# Altium PCB haut_droite.PcbDoc
Units mm, origin at the board's own origin, x right, y up, seen from the top; angles counter-clockwise.
Board outline 200.03 x 200.03 mm, 2 copper layers (TopLayer, BottomLayer); 69 components, 23 nets, 163 pads, 49 vias.
Unrouted connection lines stored in the file: 1.
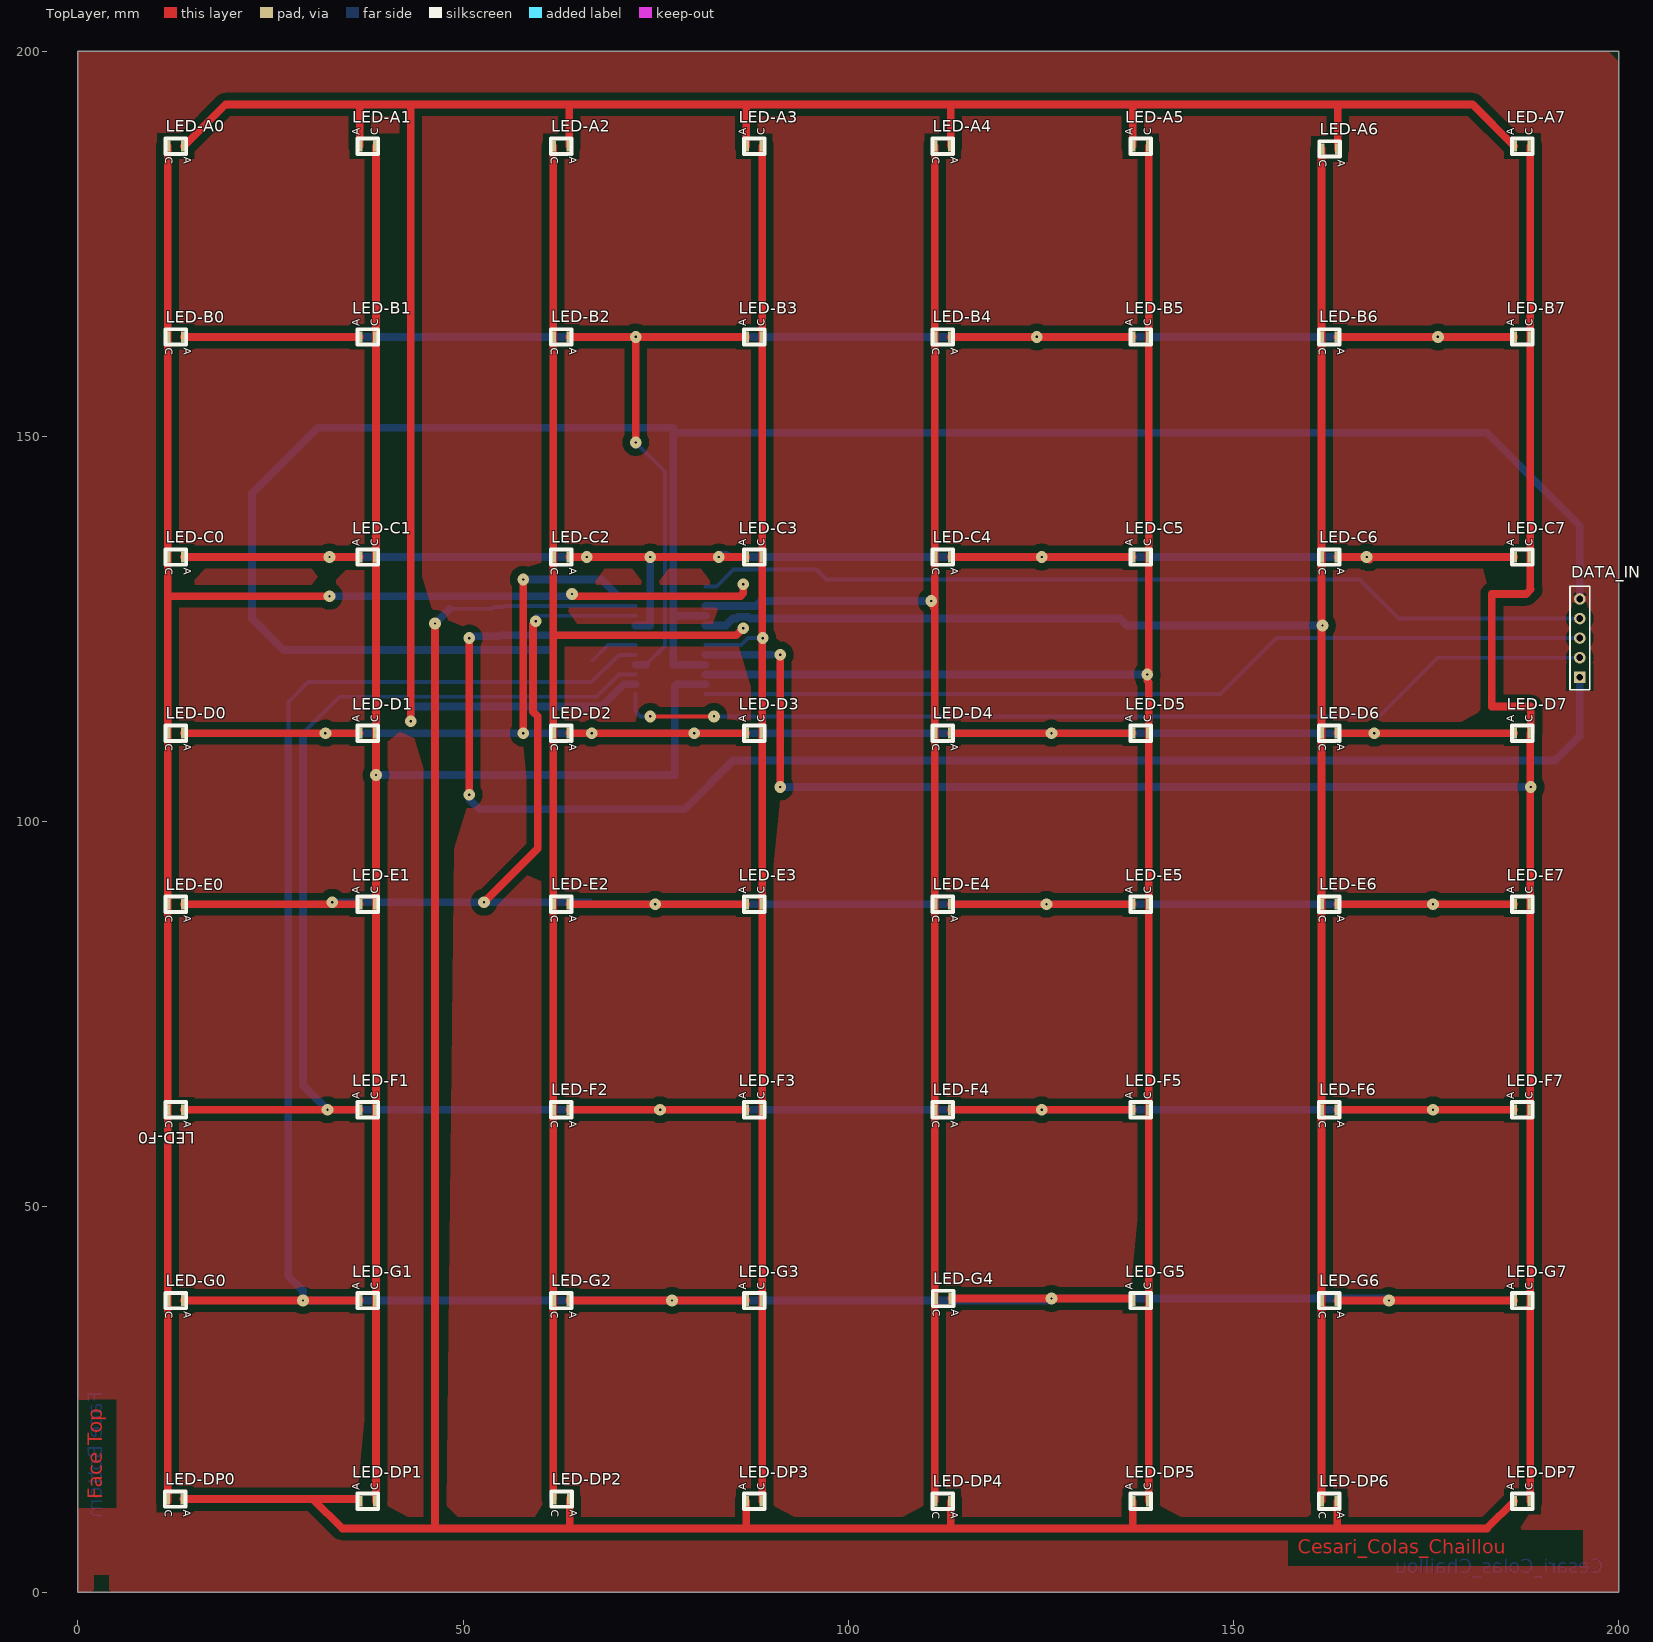
[diagram p0: TopLayer view]
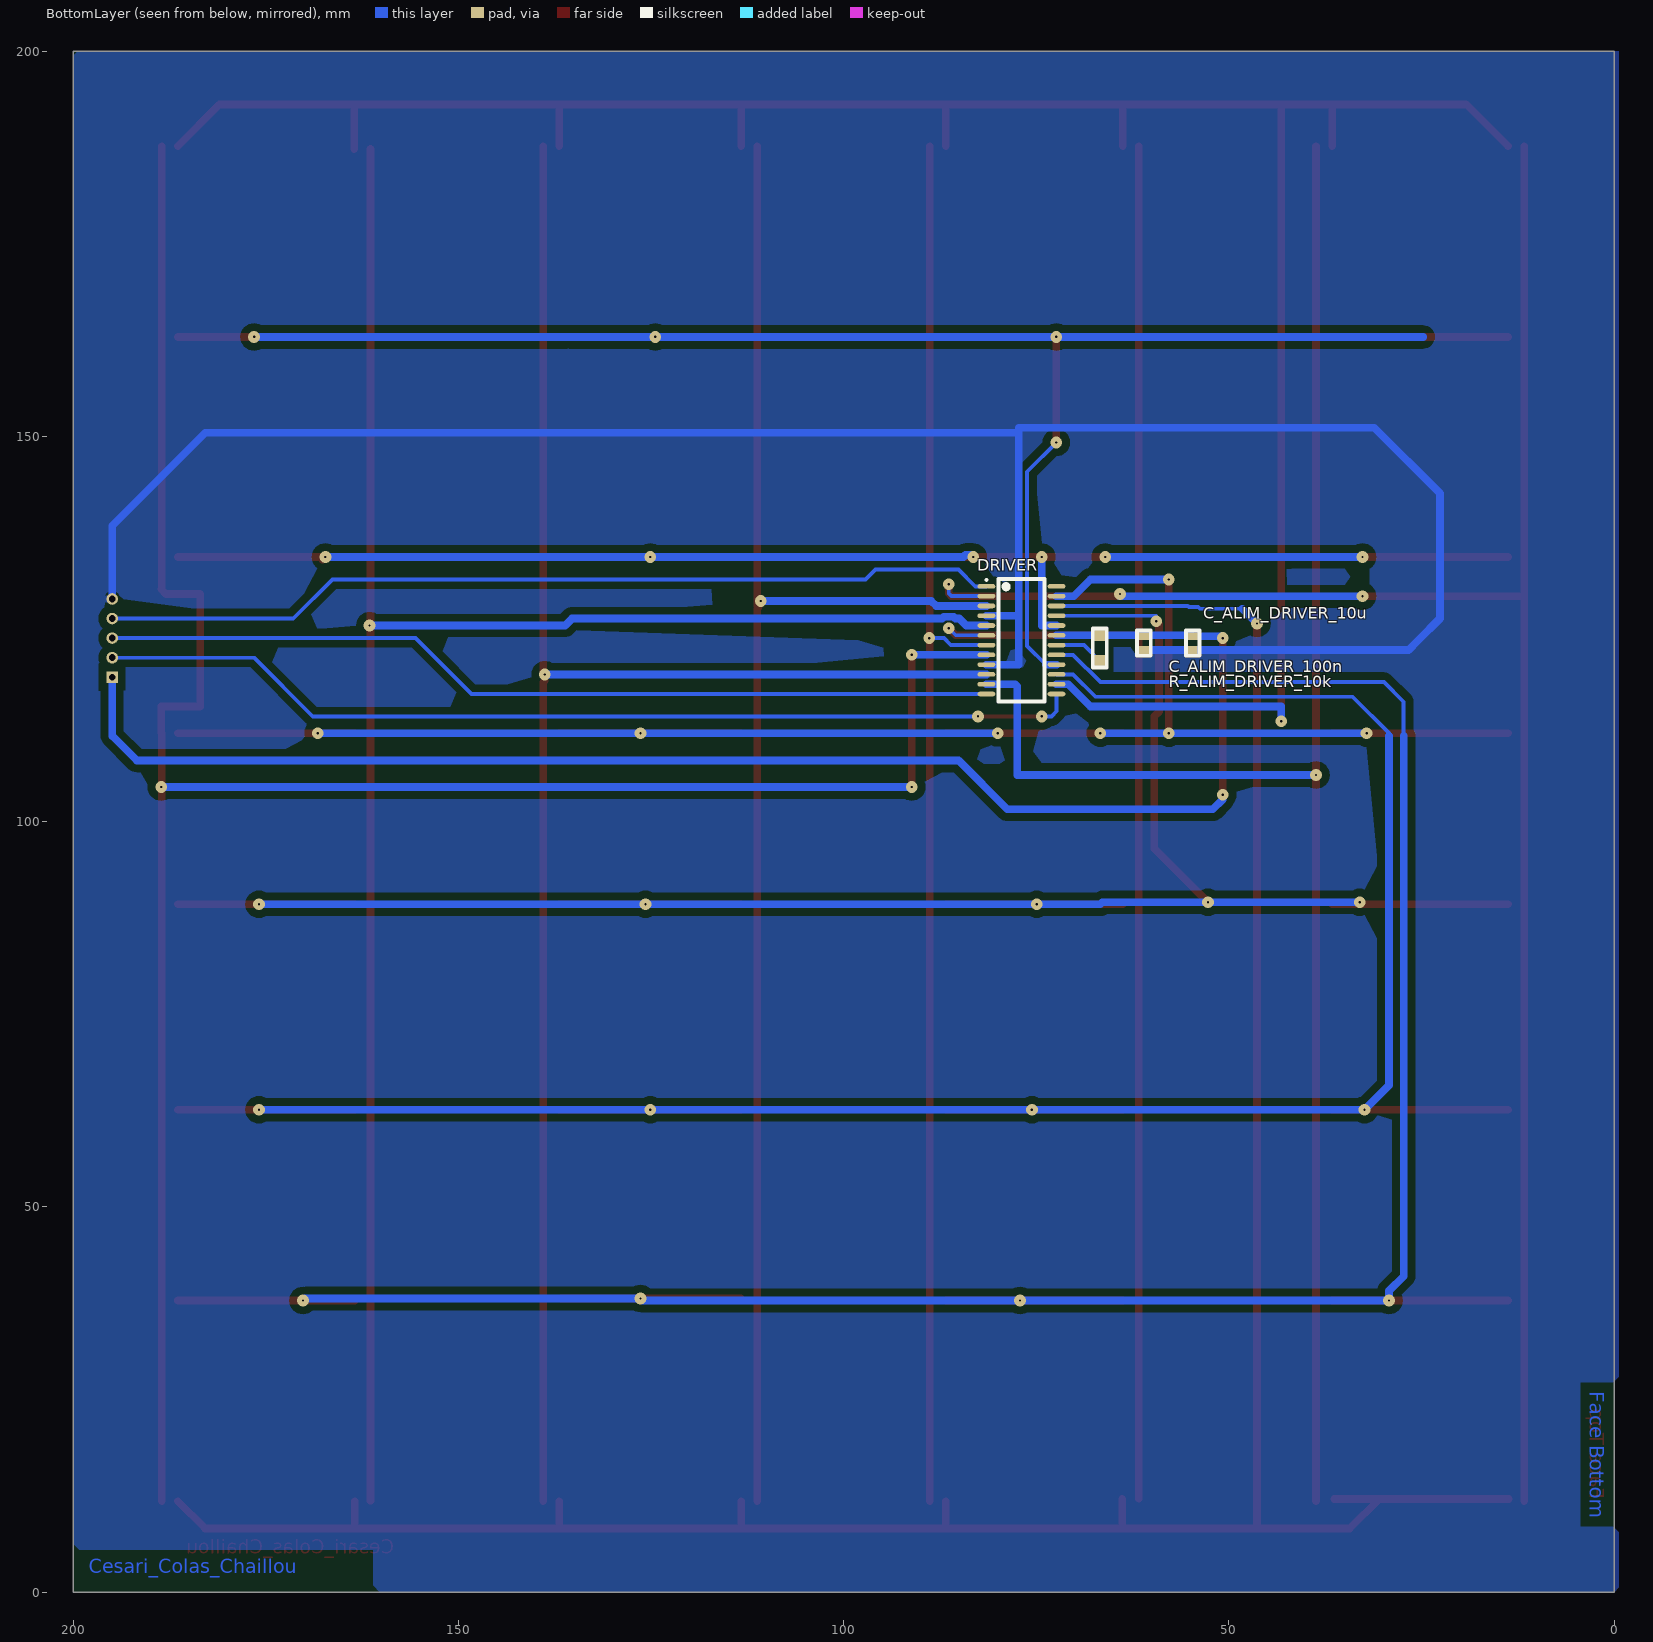
[diagram p1: BottomLayer view, seen from below]
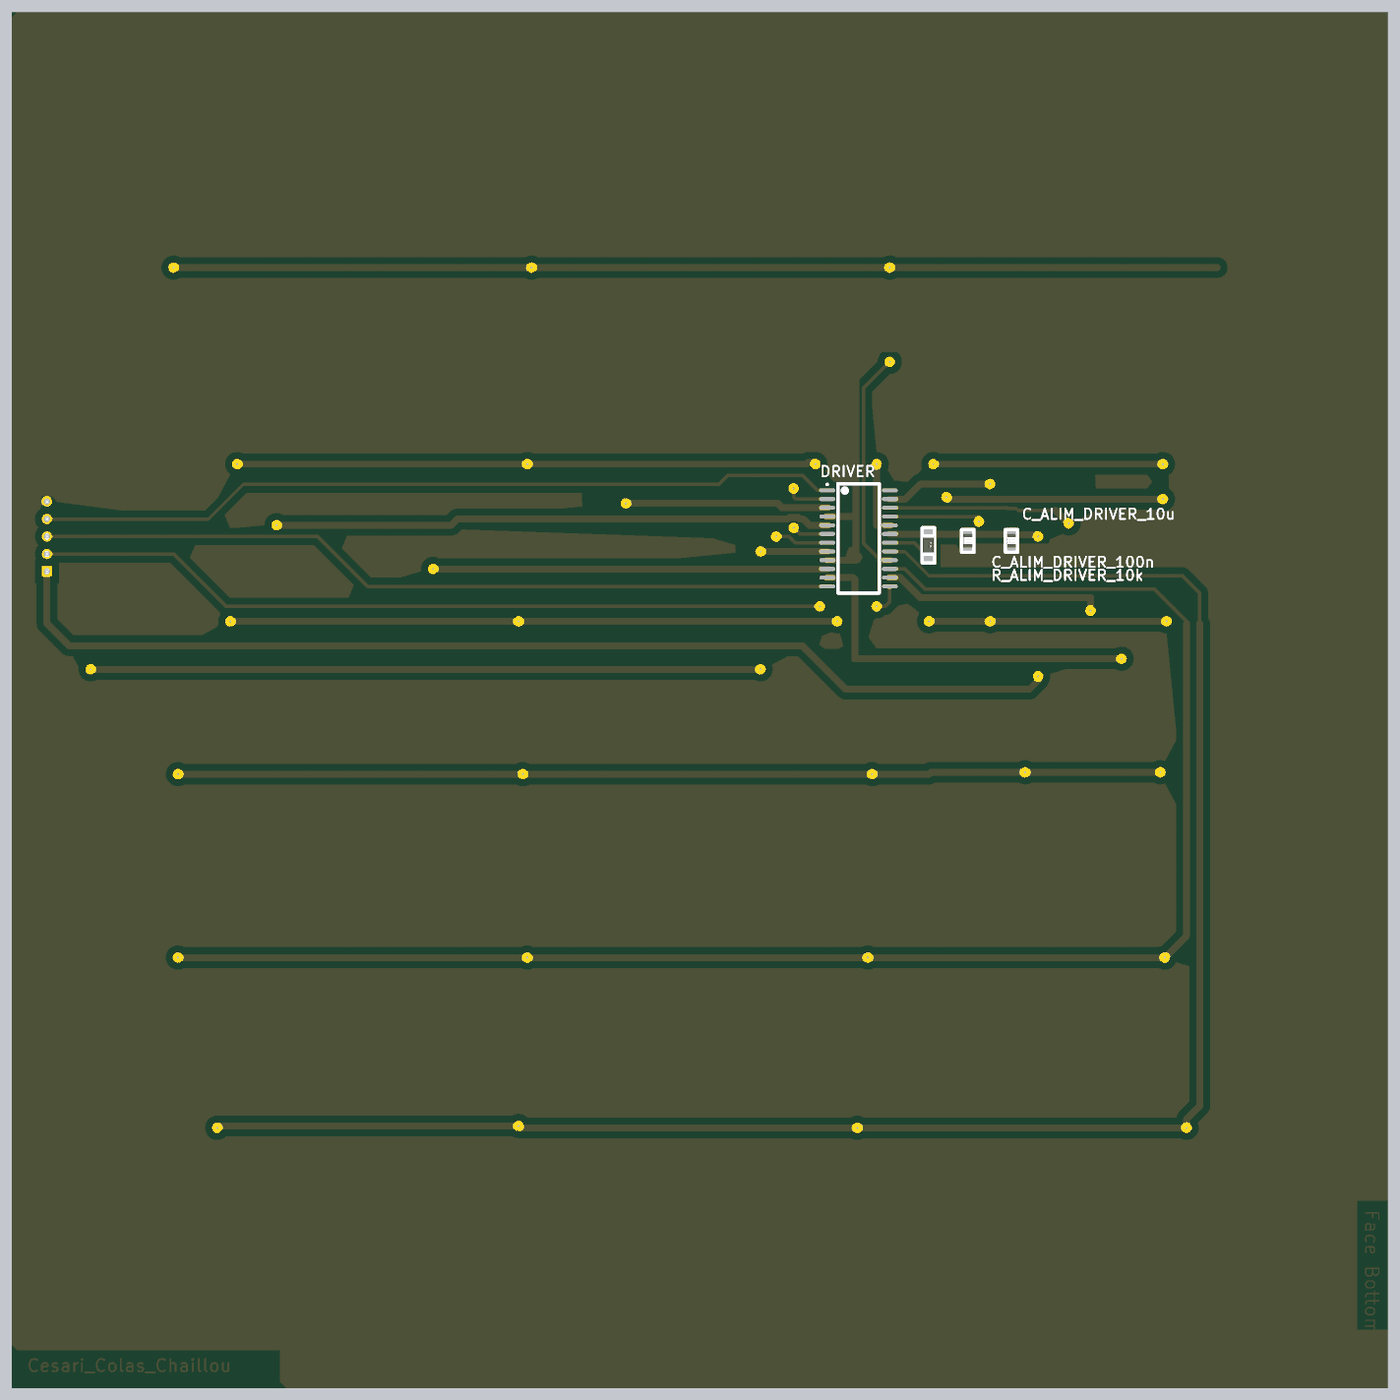
[diagram p2: 3D render of the assembled board from below, using the file's embedded part models]

## Layer stack, top to bottom
TopSolder: solder mask 0.0102, Solder Resist, Dk 3.5
TopLayer: signal copper 0.0356
Dielectric1: core 0.32, FR-4, Dk 4.8
BottomLayer: signal copper 0.0356
BottomSolder: solder mask 0.0102, Solder Resist, Dk 3.5

## Board outline
0,0 0,200.025 200.025,200.025 200.025,0

## Design rules (kind name [scope] priority, off if disabled: settings)
Clearance Clearance_1 [InNamedPolygon('gnd-bot')] p1: gap=1
Clearance Clearance_6 [InNamedPolygon('gnd-bottom')] p2: gap=1
Clearance Clearance_5 [InNamedPolygon('gnd-top')] p3: gap=1
Clearance [All] p4: gap=0.25
FabricationTestPointUsage TestPointUsage [All] p1: valid=0 allowmultiple=FALSE
FabricationTestpoint Testpoint [All] p1: side=3 testpointundercomponent=TRUE minsize=1.016 maxsize=2.54 preferedsize=1.524 minholesize=0.508 maxholesize=1.016 preferedholesize=0.813 testpointgrid=0.025 allowsidetop=TRUE allowsidebottom=TRUE usegrid=TRUE gridtolerance=0
PlaneConnect [All] p1: planeconnectstyle=Relief reliefexpansion=0.5 reliefentries=4 reliefconductorwidth=1.016 reliefairgap=0.5
PolygonConnect [All] p1: connectstyle=Relief reliefconductorwidth=1.016 reliefentries=4 polygonreliefangle="90 Angle" airgapwidth=0.254
RoomDefinition schéma_électrique_2 [InComponentClass('schéma_électrique_2')] p1: confinementstyle=ConfineIn formatcopy=TRUE lockcomponents=FALSE outline -101.6,-152.4 -50.8,-152.4 -50.8,-127 -101.6,-127
RoutingVias [All] p1: holewidth=0.3 width=1.524 viastyle="Through Hole" minholewidth=0.3 minwidth=1.524 maxholewidth=0.3 maxwidth=1.524
ShortCircuit [All] p1: allowed=TRUE
SilkToSolderMaskClearance SilkscreenOverComponentPads [IsPad] p1: minsilkscreentomaskgap=0.254 clearancetoexposedcopper=TRUE
SolderMaskExpansion [All] p1: expansion=0.051
Width Width_Power [(InNet('GND') OR InNet('+5V')  OR InNet('+3V3') OR InNet('VCC'))] p1: maxlimit=7.62 minlimit=0.406 preferedwidth=1.27
Width [All] p2: maxlimit=3 minlimit=0.5 preferedwidth=1 minimp=50.000000 maximp=50.000000 favimp=50.000000
24 further rules are at their usual default settings.

## Components (designator, comment, footprint, x,y, rotation, side; value= is the part's Value field where it differs from the comment)
C_ALIM_DRIVER_10u "CMS_0805" CONDENSATEUR_CMS_0805 54.69,122.285 r90 bottom
C_ALIM_DRIVER_100n "CMS_0805" CONDENSATEUR_CMS_0805 61.04,122.285 r90 bottom
DATA_IN "BARRETTE_5 CONTACTS_1 RANGEE_FEMELLE_DROITE" BARRETTE_5_F_D 194.945,118.745 r90 top
DRIVER "MAX7219CWG" WSO24_N 76.915,123.555 r180 bottom
LED-A0 "LED_CMS_PLCC2" LED_CMS_PLCC2 14.05,187.69 r270 top
LED-A1 "LED_CMS_PLCC2" LED_CMS_PLCC2 36.275,187.69 r90 top
LED-A2 "LED_CMS_PLCC2" LED_CMS_PLCC2 64.075,187.69 r270 top
LED-A3 "LED_CMS_PLCC2" LED_CMS_PLCC2 86.44,187.69 r90 top
LED-A4 "LED_CMS_PLCC2" LED_CMS_PLCC2 113.605,187.69 r270 top
LED-A5 "LED_CMS_PLCC2" LED_CMS_PLCC2 136.605,187.69 r90 top
LED-A6 "LED_CMS_PLCC2" LED_CMS_PLCC2 163.83,187.325 r270 top
LED-A7 "LED_CMS_PLCC2" LED_CMS_PLCC2 186.135,187.69 r90 top
LED-B0 "LED_CMS_PLCC2" LED_CMS_PLCC2 14.05,162.925 r270 top
LED-B1 "LED_CMS_PLCC2" LED_CMS_PLCC2 36.275,162.925 r90 top
LED-B2 "LED_CMS_PLCC2" LED_CMS_PLCC2 64.075,162.925 r270 top
LED-B3 "LED_CMS_PLCC2" LED_CMS_PLCC2 86.44,162.925 r90 top
LED-B4 "LED_CMS_PLCC2" LED_CMS_PLCC2 113.605,162.925 r270 top
LED-B5 "LED_CMS_PLCC2" LED_CMS_PLCC2 136.605,162.925 r90 top
LED-B6 "LED_CMS_PLCC2" LED_CMS_PLCC2 163.77,162.925 r270 top
LED-B7 "LED_CMS_PLCC2" LED_CMS_PLCC2 186.135,162.925 r90 top
LED-C0 "LED_CMS_PLCC2" LED_CMS_PLCC2 14.05,134.35 r270 top
LED-C1 "LED_CMS_PLCC2" LED_CMS_PLCC2 36.275,134.35 r90 top
LED-C2 "LED_CMS_PLCC2" LED_CMS_PLCC2 64.075,134.35 r270 top
LED-C3 "LED_CMS_PLCC2" LED_CMS_PLCC2 86.44,134.35 r90 top
LED-C4 "LED_CMS_PLCC2" LED_CMS_PLCC2 113.605,134.35 r270 top
LED-C5 "LED_CMS_PLCC2" LED_CMS_PLCC2 136.605,134.35 r90 top
LED-C6 "LED_CMS_PLCC2" LED_CMS_PLCC2 163.77,134.35 r270 top
LED-C7 "LED_CMS_PLCC2" LED_CMS_PLCC2 186.135,134.35 r90 top
LED-D0 "LED_CMS_PLCC2" LED_CMS_PLCC2 14.05,111.49 r270 top
LED-D1 "LED_CMS_PLCC2" LED_CMS_PLCC2 36.275,111.49 r90 top
LED-D2 "LED_CMS_PLCC2" LED_CMS_PLCC2 64.075,111.49 r270 top
LED-D3 "LED_CMS_PLCC2" LED_CMS_PLCC2 86.44,111.49 r90 top
LED-D4 "LED_CMS_PLCC2" LED_CMS_PLCC2 113.605,111.49 r270 top
LED-D5 "LED_CMS_PLCC2" LED_CMS_PLCC2 136.605,111.49 r90 top
LED-D6 "LED_CMS_PLCC2" LED_CMS_PLCC2 163.77,111.49 r270 top
LED-D7 "LED_CMS_PLCC2" LED_CMS_PLCC2 186.135,111.49 r90 top
LED-DP0 "LED_CMS_PLCC2" LED_CMS_PLCC2 13.97,12.065 r270 top
LED-DP1 "LED_CMS_PLCC2" LED_CMS_PLCC2 36.275,11.795 r90 top
LED-DP2 "LED_CMS_PLCC2" LED_CMS_PLCC2 64.135,12.065 r270 top
LED-DP3 "LED_CMS_PLCC2" LED_CMS_PLCC2 86.44,11.795 r90 top
LED-DP4 "LED_CMS_PLCC2" LED_CMS_PLCC2 113.605,11.795 r270 top
LED-DP5 "LED_CMS_PLCC2" LED_CMS_PLCC2 136.605,11.795 r90 top
LED-DP6 "LED_CMS_PLCC2" LED_CMS_PLCC2 163.77,11.795 r270 top
LED-DP7 "LED_CMS_PLCC2" LED_CMS_PLCC2 186.135,11.795 r90 top
LED-E0 "LED_CMS_PLCC2" LED_CMS_PLCC2 14.05,89.265 r270 top
LED-E1 "LED_CMS_PLCC2" LED_CMS_PLCC2 36.275,89.265 r90 top
LED-E2 "LED_CMS_PLCC2" LED_CMS_PLCC2 64.075,89.265 r270 top
LED-E3 "LED_CMS_PLCC2" LED_CMS_PLCC2 86.44,89.265 r90 top
LED-E4 "LED_CMS_PLCC2" LED_CMS_PLCC2 113.605,89.265 r270 top
LED-E5 "LED_CMS_PLCC2" LED_CMS_PLCC2 136.605,89.265 r90 top
LED-E6 "LED_CMS_PLCC2" LED_CMS_PLCC2 163.77,89.265 r270 top
LED-E7 "LED_CMS_PLCC2" LED_CMS_PLCC2 186.135,89.265 r90 top
LED-F0 "LED_CMS_PLCC2" LED_CMS_PLCC2 14.05,62.595 r270 top
LED-F1 "LED_CMS_PLCC2" LED_CMS_PLCC2 36.275,62.595 r90 top
LED-F2 "LED_CMS_PLCC2" LED_CMS_PLCC2 64.075,62.595 r270 top
LED-F3 "LED_CMS_PLCC2" LED_CMS_PLCC2 86.44,62.595 r90 top
LED-F4 "LED_CMS_PLCC2" LED_CMS_PLCC2 113.605,62.595 r270 top
LED-F5 "LED_CMS_PLCC2" LED_CMS_PLCC2 136.605,62.595 r90 top
LED-F6 "LED_CMS_PLCC2" LED_CMS_PLCC2 163.77,62.595 r270 top
LED-F7 "LED_CMS_PLCC2" LED_CMS_PLCC2 186.135,62.595 r90 top
LED-G0 "LED_CMS_PLCC2" LED_CMS_PLCC2 14.05,37.83 r270 top
LED-G1 "LED_CMS_PLCC2" LED_CMS_PLCC2 36.275,37.83 r90 top
LED-G2 "LED_CMS_PLCC2" LED_CMS_PLCC2 64.075,37.83 r270 top
LED-G3 "LED_CMS_PLCC2" LED_CMS_PLCC2 86.44,37.83 r90 top
LED-G4 "LED_CMS_PLCC2" LED_CMS_PLCC2 113.665,38.1 r270 top
LED-G5 "LED_CMS_PLCC2" LED_CMS_PLCC2 136.605,37.83 r90 top
LED-G6 "LED_CMS_PLCC2" LED_CMS_PLCC2 163.77,37.83 r270 top
LED-G7 "LED_CMS_PLCC2" LED_CMS_PLCC2 186.135,37.83 r90 top
R_ALIM_DRIVER_10k "RESISTANCE_CMS_1206" RESISTANCE_CMS_1206 66.755,124.19 r270 bottom

## Footprints (in the part's own frame and the unit in brackets; to place one, negate y for a bottom-side part, rotate by r counter-clockwise, add the part's x,y. Pads: shape width x height; smd on the part's side, far side on the other; paste and mask are expansions set on the pad)
BARRETTE_5_F_D [mm] "BARRETTE 5 CONTACTS ; 1 RANGEE ; DROITE ; FEMELLE ; ESPACEMENT BROCHES = 2.54 mm"
  rect 1.5x1.5 hole 0.9: 1(0,0)
  round 1.5 hole 0.9: 2(2.54,0) 3(5.08,0) 4(7.62,0) 5(10.16,0)
  silkscreen extent -1.6,-1.27 11.8,1.27, body extent -1.5,-1.2 11.7,1.21, height 8.5
CONDENSATEUR_CMS_0805 [mm] "CONDENSATEUR CMS 0805 ; DIMENSIONS : 2mm x 1.25mm"
  rect 1x1.3 smd: 1(0,0) 2(1.79,-0.01)
  silkscreen extent -0.74,-0.9 2.53,0.89, body extent -0.09,-0.67 1.91,0.64, height 0.73
LED_CMS_PLCC2 [mm] "LED CMS PLCC2 ; DIMENSIONS : 2.7mm x 2.0mm"
  rect 1.4x0.75 smd: 1(0,-0.3) 2(0,-2.4)
  silkscreen extent -1,-2.7 1,0
RESISTANCE_CMS_1206 [mil] "RESISTANCE CMS 1206 ; DIMENSIONS : 3.2mm x 1.6mm"
  rect 60x60 smd: 1(0,0) 2(130,0)
  silkscreen extent -35,-35 165,35, body extent 0,-31 126,31, height 39
WSO24_N [mm] "SOIC, 24-Leads, Body 15.4x7.5mm, Pitch 1.27mm, IPC Medium Density"
  oval 2.3x0.6 smd: 1(-4.55,6.985) 2(-4.55,5.715) 3(-4.55,4.445) 4(-4.55,3.175) 5(-4.55,1.905) 6(-4.55,0.635) 7(-4.55,-0.635) 8(-4.55,-1.905) 9(-4.55,-3.175) 10(-4.55,-4.445) 11(-4.55,-5.715) 12(-4.55,-6.985) 13(4.55,-6.985) 14(4.55,-5.715) 15(4.55,-4.445) 16(4.55,-3.175) 17(4.55,-1.905) 18(4.55,-0.635) 19(4.55,0.635) 20(4.55,1.905) 21(4.55,3.175) 22(4.55,4.445) 23(4.55,5.715) 24(4.55,6.985)
  silkscreen extent -4.67,-7.95 3,7.96, body extent -3.8,-7.8 3.8,7.8, height 2.65

## Part data
C_ALIM_DRIVER_10u C_ALIM_DRIVER_100n: library part CONDENSATEUR_CMS_CER_0805, "CONDENSATEUR CMS CERAMIQUE 0805"
DATA_IN: "BARRETTE 5 CONTACTS 1 RANGEE FEMELLE DROITE"
DRIVER: "Serially Interfaced, 8-Digit LED Display Driver"
LED-A0 LED-A1 LED-A2 LED-A3 LED-A4 LED-A5 LED-A6 LED-A7 LED-B0 LED-B1 LED-B2 LED-B3 LED-B4 LED-B5 LED-B6 LED-B7 LED-C0 LED-C1 LED-C2 LED-C3 LED-C4 LED-C5 LED-C6 LED-C7 LED-D0 LED-D1 LED-D2 LED-D3 LED-D4 LED-D5 LED-D6 LED-D7 LED-DP0 LED-DP1 LED-DP2 LED-DP3 LED-DP4 LED-DP5 LED-DP6 LED-DP7 LED-E0 LED-E1 LED-E2 LED-E3 LED-E4 LED-E5 LED-E6 LED-E7 LED-F0 LED-F1 LED-F2 LED-F3 LED-F4 LED-F5 LED-F6 LED-F7 LED-G0 LED-G1 LED-G2 LED-G3 LED-G4 LED-G5 LED-G6 LED-G7: "LED CMS PLCC2"
R_ALIM_DRIVER_10k: "RESISTANCE CMS 1206"

## Via types
v1: diameter 1.524, hole 0.3, TopLayer to BottomLayer, 49 vias

## Nets (pads, with @x,y where several pads share a name; then routed paths per layer and width w, separated by ;. In a path a pad name is that pad's centre, name@x,y a point inside that pad or via, vN(x,y) a via of type N, cw(c..) or ccw(c..) an arc to the next point about the centre after c; other vN are vias at no path point)
CLK: DATA_IN.2 DRIVER.13 | length 128.3
  TopLayer w0.5: v1(74.295,113.665) v1(82.55,113.665)
  BottomLayer w0.5: DRIVER.13 72.365,114.325 73.025,113.665 v1(74.295,113.665) ; v1(82.55,113.665) 168.91,113.665 176.53,121.285 DATA_IN.2
DIN: DATA_IN.4 DRIVER.1 | length 117
  BottomLayer w0.5: DRIVER.1 82.915,130.54 85.09,132.715 95.885,132.715 97.155,131.445 166.37,131.445 171.45,126.365 DATA_IN.4
DOUT: DRIVER.24
GND: C_ALIM_DRIVER_10u.1 C_ALIM_DRIVER_100n.1 DATA_IN.5 DRIVER.4 DRIVER.9 | length 285.9
  BottomLayer w1: C_ALIM_DRIVER_100n.1 C_ALIM_DRIVER_10u.1 26.67,122.285 25.4,123.555 22.59,126.365 22.59,142.605 31.115,151.13 77.28,151.13 77.28,150.495 ; DRIVER.9 77.28,120.38 77.28,126.73 ; DRIVER.4 77.28,126.73 ; DATA_IN.5 194.945,138.43 182.88,150.495 77.28,150.495 ; 77.28,126.73 77.28,150.495
LED0: DRIVER.2 LED-A0.2 LED-B0.2 LED-C0.2 LED-D0.2 LED-DP0.2 LED-E0.2 LED-F0.2 LED-G0.2 | length 257.5
  TopLayer w1: LED-DP0.2@11.65,11.795 LED-G0.2 LED-F0.2 LED-E0.2 LED-D0.2 LED-C0.2 LED-B0.2 LED-A0.2 ; 11.92,129.27 v1(32.655,129.27) ; v1@64.5,129.27 85.995,129.27 86.36,129.635 v1(86.36,130.81)
  BottomLayer w0.5: DRIVER.2 85.995,129.27 86.36,129.635 v1(86.36,130.81)
  BottomLayer w1: v1(32.655,129.27) v1@64.135,129.27
  other v1: 64.135,129.54
LED1: DRIVER.11 LED-A1.2 LED-B1.2 LED-C1.2 LED-D1.2 LED-DP1.2 LED-E1.2 LED-F1.2 LED-G1.2 | length 230.3
  TopLayer w1: LED-DP1.2 LED-G1.2 LED-F1.2 LED-E1.2 v1(38.675,106.045) LED-D1.2 LED-C1.2 LED-B1.2 LED-A1.2
  BottomLayer w1: v1(38.675,106.045) 77.47,106.045 77.47,117.57 77.74,117.84 DRIVER.11
LED2: DRIVER.6 LED-A2.2 LED-B2.2 LED-C2.2 LED-D2.2 LED-DP2.2 LED-E2.2 LED-F2.2 LED-G2.2 | length 205.9
  TopLayer w1: LED-DP2.2@61.675,12.125 LED-G2.2 LED-F2.2 LED-E2.2 LED-D2.2 LED-C2.2 LED-B2.2 LED-A2.2 ; 61.68,124.19 85.455,124.19 v1(86.36,125.095)
  BottomLayer w0.5: DRIVER.6 85.455,124.19 v1(86.36,125.095)
LED3: DRIVER.7 LED-A3.2 LED-B3.2 LED-C3.2 LED-D3.2 LED-DP3.2 LED-E3.2 LED-F3.2 LED-G3.2 | length 183.7
  TopLayer w1: LED-DP3.2 LED-G3.2 LED-F3.2 LED-E3.2 LED-D3.2 LED-C3.2 LED-B3.2 LED-A3.2
  BottomLayer w0.5: DRIVER.7 86.09,122.92 86.995,123.825 v1(88.9,123.825)
LED4: DRIVER.3 LED-A4.2 LED-B4.2 LED-C4.2 LED-D4.2 LED-DP4.2 LED-E4.2 LED-F4.2 LED-G4.2 | length 206.2
  TopLayer w1: v1(110.76,128.635) 111.205,127.555 111.205,126.365 LED-D4.2 LED-E4.2 LED-F4.2 LED-DP4.2 ; 111.205,128 LED-C4.2 LED-B4.2 LED-A4.2
  BottomLayer w1: DRIVER.3 87.995,128 88.63,128.635 v1(110.76,128.635)
LED5: DRIVER.10 LED-A5.2 LED-B5.2 LED-C5.2 LED-D5.2 LED-DP5.2 LED-E5.2 LED-F5.2 LED-G5.2 | length 233.3
  TopLayer w1: v1(138.795,119.11) 138.795,118.32 139.005,118.11 LED-D5.2 LED-E5.2 LED-F5.2 LED-G5.2 LED-DP5.2 ; v1@139.005,119.11 LED-C5.2 LED-B5.2 LED-A5.2
  BottomLayer w1: DRIVER.10 v1(138.795,119.11)
LED6: DRIVER.5 LED-A6.2 LED-B6.2 LED-C6.2 LED-D6.2 LED-DP6.2 LED-E6.2 LED-F6.2 LED-G6.2 | length 256.5
  TopLayer w1: LED-DP6.2@161.43,11.855 LED-A6.2
  BottomLayer w1: DRIVER.5 84.101,125.46 85.006,126.365 85.492,126.365 85.734,126.607 86.986,126.607 87.228,126.365 135.255,126.365 136.16,125.46 v1(161.56,125.46)
LED7: DRIVER.8 LED-A7.2 LED-B7.2 LED-C7.2 LED-D7.2 LED-DP7.2 LED-E7.2 LED-F7.2 LED-G7.2 | length 310
  TopLayer w1: v1(91.17,104.505) v1(91.17,121.65) ; LED-DP7.2 LED-G7.2 LED-F7.2 LED-E7.2 LED-D7.2 188.595,111.55 188.595,114.935 183.515,114.935 183.515,129.54 187.96,129.54 188.595,130.175 188.535,130.235 LED-C7.2 LED-B7.2 LED-A7.2
  BottomLayer w1: DRIVER.8 v1(91.17,121.65) ; v1(91.17,104.505) v1(188.595,104.505)
LEDA: DRIVER.14 LED-A0.1 LED-A1.1 LED-A2.1 LED-A3.1 LED-A4.1 LED-A5.1 LED-A6.1 LED-A7.1 | length 321
  TopLayer w1: LED-A0.1 19.165,193.105 43.18,193.105 ; LED-A1.1 36.575,192.805 ; v1(43.18,113.03) 43.18,193.105 ; LED-A2.1 63.775,192.745 ; LED-A3.1 86.74,192.805 ; LED-A4.1 113.305,192.83 ; LED-A5.1 136.905,192.805 ; LED-A6.1 163.53,192.77 163.195,193.105 ; LED-A7.1 181.02,193.105 163.195,193.105 ; 43.18,193.105 163.195,193.105
  BottomLayer w1: v1(43.18,113.03) 43.18,114.935 67.945,114.935 70.85,117.84 DRIVER.14
LEDB: DRIVER.16 LED-B0.1 LED-B1.1 LED-B2.1 LED-B3.1 LED-B4.1 LED-B5.1 LED-B6.1 LED-B7.1 | length 290.4
  TopLayer w1: LED-B0.1 24.765,162.925 LED-B1.1 ; LED-B2.1 v1(72.39,162.925) ; v1(72.39,149.225) v1(72.39,162.925) ; LED-B3.1 v1(72.39,162.925) ; LED-B4.1 LED-B5.1 ; LED-B6.1 v1(176.53,162.925) LED-B7.1
  BottomLayer w0.5: v1(72.39,149.225) 76.2,145.415 76.2,122.814 73.766,120.38
  BottomLayer w1: 24.765,162.925 v1(72.39,162.925) 135.62,162.925 ; DRIVER.16 73.766,120.38 ; 135.89,162.925 v1(176.53,162.925)
  other v1: 124.46,162.925
LEDC: DRIVER.20 LED-C0.1 LED-C1.1 LED-C2.1 LED-C3.1 LED-C4.1 LED-C5.1 LED-C6.1 LED-C7.1 | length 221.4
  TopLayer w1: LED-C0.1 v1(32.655,134.35) LED-C1.1 ; LED-C2.1 v1(66.04,134.35) v1(74.295,134.35) v1(83.185,134.35) LED-C3.1 ; LED-C4.1 LED-C5.1 ; LED-C6.1 v1(167.275,134.35) ; v1@167.64,133.985 v1(167.275,134.35) ; LED-C7.1 v1(167.275,134.35)
  BottomLayer w1: v1(32.655,134.35) v1(66.04,134.35) ; DRIVER.20 74.295,125.46 v1(74.295,134.35) ; v1(83.185,134.35) 83.455,134.62 84.185,134.62 84.455,134.35 v1(167.275,134.35)
  other v1: 125.095,134.35
LEDD: DRIVER.23 LED-D0.1 LED-D1.1 LED-D2.1 LED-D3.1 LED-D4.1 LED-D5.1 LED-D6.1 LED-D7.1 | length 250.6
  TopLayer w1: LED-D0.1 v1(32.115,111.49) LED-D1.1 ; v1(57.785,111.49) v1(57.785,131.445) ; LED-D2.1 v1(66.675,111.49) v1(80.01,111.49) LED-D3.1 ; LED-D4.1 v1(126.365,111.49) LED-D5.1 ; LED-D6.1 v1(168.275,111.49) LED-D7.1
  BottomLayer w1: v1(32.115,111.49) v1(57.785,111.49) v1(66.675,111.49) ; v1(57.785,131.445) 67.945,131.445 70.12,129.27 DRIVER.23 ; v1(80.01,111.49) v1(126.365,111.49) v1(168.275,111.49)
LEDDP: DRIVER.22 LED-DP0.1 LED-DP1.1 LED-DP2.1 LED-DP3.1 LED-DP4.1 LED-DP5.1 LED-DP6.1 LED-DP7.1 | length 342.8
  TopLayer w1: LED-DP0.1 30.48,12.065 ; LED-DP1.1@36.305,12.065 30.48,12.065 ; v1(46.355,125.73) 46.355,8.255 ; 63.835,8.59 LED-DP2.1 ; 86.74,8.635 LED-DP3.1 ; LED-DP4.1 113.305,8.53 113.03,8.255 ; 136.905,8.635 LED-DP5.1 ; 163.47,8.53 LED-DP6.1 ; LED-DP7.1 182.895,8.255 113.03,8.255 ; 30.48,12.065 34.29,8.255 46.355,8.255 ; 46.355,8.255 113.03,8.255
  BottomLayer w0.5: 48.26,127.635 53.742,127.635 53.984,127.877 55.201,127.877 55.324,128 DRIVER.22
  BottomLayer w1: v1(46.355,125.73) 48.26,127.635
LEDE: DRIVER.21 LED-E0.1 LED-E1.1 LED-E2.1 LED-E3.1 LED-E4.1 LED-E5.1 LED-E6.1 LED-E7.1 | length 288.8
  TopLayer w1: LED-E0.1 LED-E1.1 ; v1(52.705,89.535) 59.69,96.52 59.69,113.665 59.055,114.3 59.055,125.635 v1(59.42,126) ; LED-E2.1 66.675,89.265 82.55,89.265 LED-E3.1 ; LED-E4.1 v1(125.73,89.265) LED-E5.1 ; LED-E6.1 v1(175.895,89.265) LED-E7.1
  BottomLayer w0.5: v1(59.42,126) 59.42,126.73 DRIVER.21
  BottomLayer w1: v1(33.02,89.535) 57.15,89.535 66.405,89.535 66.675,89.265 v1(74.93,89.265) v1(125.73,89.265) v1(175.895,89.265)
LEDF: DRIVER.15 LED-F0.1 LED-F1.1 LED-F2.1 LED-F3.1 LED-F4.1 LED-F5.1 LED-F6.1 LED-F7.1 | length 332.7
  TopLayer w1: LED-F0.1 v1(32.385,62.595) LED-F1.1 ; LED-F2.1 LED-F3.1 ; LED-F4.1 v1(125.095,62.595) LED-F5.1 ; LED-F6.1 v1(175.895,62.595) LED-F7.1
  BottomLayer w0.5: 29.21,111.49 33.925,116.205 67.31,116.205 70.215,119.11 DRIVER.15
  BottomLayer w1: 29.21,67.945 29.21,111.125 ; 29.21,68.58 29.21,65.77 v1(32.385,62.595) v1(75.565,62.595) v1(125.095,62.595) v1(175.895,62.595)
LEDG: DRIVER.17 LED-G0.1 LED-G1.1 LED-G2.1 LED-G3.1 LED-G4.1 LED-G5.1 LED-G6.1 LED-G7.1 | length 359.3
  TopLayer w1: LED-G0.1 v1(29.21,37.83) LED-G1.1 ; LED-G2.1 v1(77.105,37.83) LED-G3.1 ; LED-G4.1 v1(126.365,38.1) LED-G5.1@136.635,38.1 ; LED-G6.1 v1(170.18,37.83) LED-G7.1
  BottomLayer w0.5: 27.305,111.125 27.305,115.57 29.845,118.11 66.675,118.11 70.215,121.65 DRIVER.17
  BottomLayer w1: 27.305,111.125 27.305,41.005 29.21,39.1 v1(29.21,37.83) v1(77.105,37.83) 126.095,37.83 v1(126.365,38.1) 169.91,38.1 v1(170.18,37.83)
LOAD: DATA_IN.3 DRIVER.12 | length 116.5
  BottomLayer w0.5: DRIVER.12 148.32,116.57 155.575,123.825 DATA_IN.3
NetDRIVER_18: DRIVER.18 R_ALIM_DRIVER_10k.2 | length 6.5
  BottomLayer w0.5: R_ALIM_DRIVER_10k.2 68.787,122.92 DRIVER.18
VCC: C_ALIM_DRIVER_10u.2 C_ALIM_DRIVER_100n.2 DATA_IN.1 DRIVER.19 R_ALIM_DRIVER_10k.1 | length 198.6
  TopLayer w1: v1(50.8,103.505) v1(50.8,123.825)
  BottomLayer w1: v1(50.8,103.505) 50.8,102.87 52.07,101.6 78.74,101.6 85.09,107.95 191.77,107.95 194.945,111.125 DATA_IN.1 ; v1@50.8,124.075 C_ALIM_DRIVER_10u.2 ; C_ALIM_DRIVER_10u.2@54.795,124.19 R_ALIM_DRIVER_10k.1 DRIVER.19

## Polygon pours and split planes (outlines as drawn)
GND on BottomLayer "gnd-bot" (solid, pour order 11): 0,200.025 199.39,200.025 200.025,200.66 200.025,0 0,0 -0.635,0.635 -0.635,200.025
GND on TopLayer "gnd-top" (solid, pour order 13): 0,200.025 0,0 200.025,0 200.025,200.025

## Other copper
TopLayer:
  text "Face Top" at 3.175,12.065 h1.91 r90
  text "Cesari_Colas_Chaillou" at 158.369,4.953 h1.8
BottomLayer:
  text "Face Bottom" at 3.175,26.035 h1.91 r90
  text "Cesari_Colas_Chaillou" at 197.993,2.413 h1.8

## Text inside footprints (layer, text, board x,y; h text height)
LED-A0: TopOverlay "A" at 13.75,186.29 h1 r270; TopOverlay "C" at 11.35,186.29 h1 r270
LED-A1: TopOverlay "A" at 36.575,189.09 h1 r90; TopOverlay "C" at 38.975,189.09 h1 r90
LED-A2: TopOverlay "A" at 63.775,186.29 h1 r270; TopOverlay "C" at 61.375,186.29 h1 r270
LED-A3: TopOverlay "A" at 86.74,189.09 h1 r90; TopOverlay "C" at 89.14,189.09 h1 r90
LED-A4: TopOverlay "A" at 113.305,186.29 h1 r270; TopOverlay "C" at 110.905,186.29 h1 r270
LED-A5: TopOverlay "A" at 136.905,189.09 h1 r90; TopOverlay "C" at 139.305,189.09 h1 r90
LED-A6: TopOverlay "A" at 163.53,185.925 h1 r270; TopOverlay "C" at 161.13,185.925 h1 r270
LED-A7: TopOverlay "A" at 186.435,189.09 h1 r90; TopOverlay "C" at 188.835,189.09 h1 r90
LED-B0: TopOverlay "A" at 13.75,161.525 h1 r270; TopOverlay "C" at 11.35,161.525 h1 r270
LED-B1: TopOverlay "A" at 36.575,164.325 h1 r90; TopOverlay "C" at 38.975,164.325 h1 r90
LED-B2: TopOverlay "A" at 63.775,161.525 h1 r270; TopOverlay "C" at 61.375,161.525 h1 r270
LED-B3: TopOverlay "A" at 86.74,164.325 h1 r90; TopOverlay "C" at 89.14,164.325 h1 r90
LED-B4: TopOverlay "A" at 113.305,161.525 h1 r270; TopOverlay "C" at 110.905,161.525 h1 r270
LED-B5: TopOverlay "A" at 136.905,164.325 h1 r90; TopOverlay "C" at 139.305,164.325 h1 r90
LED-B6: TopOverlay "A" at 163.47,161.525 h1 r270; TopOverlay "C" at 161.07,161.525 h1 r270
LED-B7: TopOverlay "A" at 186.435,164.325 h1 r90; TopOverlay "C" at 188.835,164.325 h1 r90
LED-C0: TopOverlay "A" at 13.75,132.95 h1 r270; TopOverlay "C" at 11.35,132.95 h1 r270
LED-C1: TopOverlay "A" at 36.575,135.75 h1 r90; TopOverlay "C" at 38.975,135.75 h1 r90
LED-C2: TopOverlay "A" at 63.775,132.95 h1 r270; TopOverlay "C" at 61.375,132.95 h1 r270
LED-C3: TopOverlay "A" at 86.74,135.75 h1 r90; TopOverlay "C" at 89.14,135.75 h1 r90
LED-C4: TopOverlay "A" at 113.305,132.95 h1 r270; TopOverlay "C" at 110.905,132.95 h1 r270
LED-C5: TopOverlay "A" at 136.905,135.75 h1 r90; TopOverlay "C" at 139.305,135.75 h1 r90
LED-C6: TopOverlay "A" at 163.47,132.95 h1 r270; TopOverlay "C" at 161.07,132.95 h1 r270
LED-C7: TopOverlay "A" at 186.435,135.75 h1 r90; TopOverlay "C" at 188.835,135.75 h1 r90
LED-D0: TopOverlay "A" at 13.75,110.09 h1 r270; TopOverlay "C" at 11.35,110.09 h1 r270
LED-D1: TopOverlay "A" at 36.575,112.89 h1 r90; TopOverlay "C" at 38.975,112.89 h1 r90
LED-D2: TopOverlay "A" at 63.775,110.09 h1 r270; TopOverlay "C" at 61.375,110.09 h1 r270
LED-D3: TopOverlay "A" at 86.74,112.89 h1 r90; TopOverlay "C" at 89.14,112.89 h1 r90
LED-D4: TopOverlay "A" at 113.305,110.09 h1 r270; TopOverlay "C" at 110.905,110.09 h1 r270
LED-D5: TopOverlay "A" at 136.905,112.89 h1 r90; TopOverlay "C" at 139.305,112.89 h1 r90
LED-D6: TopOverlay "A" at 163.47,110.09 h1 r270; TopOverlay "C" at 161.07,110.09 h1 r270
LED-D7: TopOverlay "A" at 186.435,112.89 h1 r90; TopOverlay "C" at 188.835,112.89 h1 r90
LED-DP0: TopOverlay "A" at 13.67,10.665 h1 r270; TopOverlay "C" at 11.27,10.665 h1 r270
LED-DP1: TopOverlay "A" at 36.575,13.195 h1 r90; TopOverlay "C" at 38.975,13.195 h1 r90
LED-DP2: TopOverlay "A" at 63.835,10.665 h1 r270; TopOverlay "C" at 61.435,10.665 h1 r270
LED-DP3: TopOverlay "A" at 86.74,13.195 h1 r90; TopOverlay "C" at 89.14,13.195 h1 r90
LED-DP4: TopOverlay "A" at 113.305,10.395 h1 r270; TopOverlay "C" at 110.905,10.395 h1 r270
LED-DP5: TopOverlay "A" at 136.905,13.195 h1 r90; TopOverlay "C" at 139.305,13.195 h1 r90
LED-DP6: TopOverlay "A" at 163.47,10.395 h1 r270; TopOverlay "C" at 161.07,10.395 h1 r270
LED-DP7: TopOverlay "A" at 186.435,13.195 h1 r90; TopOverlay "C" at 188.835,13.195 h1 r90
LED-E0: TopOverlay "A" at 13.75,87.865 h1 r270; TopOverlay "C" at 11.35,87.865 h1 r270
LED-E1: TopOverlay "A" at 36.575,90.665 h1 r90; TopOverlay "C" at 38.975,90.665 h1 r90
LED-E2: TopOverlay "A" at 63.775,87.865 h1 r270; TopOverlay "C" at 61.375,87.865 h1 r270
LED-E3: TopOverlay "A" at 86.74,90.665 h1 r90; TopOverlay "C" at 89.14,90.665 h1 r90
LED-E4: TopOverlay "A" at 113.305,87.865 h1 r270; TopOverlay "C" at 110.905,87.865 h1 r270
LED-E5: TopOverlay "A" at 136.905,90.665 h1 r90; TopOverlay "C" at 139.305,90.665 h1 r90
LED-E6: TopOverlay "A" at 163.47,87.865 h1 r270; TopOverlay "C" at 161.07,87.865 h1 r270
LED-E7: TopOverlay "A" at 186.435,90.665 h1 r90; TopOverlay "C" at 188.835,90.665 h1 r90
LED-F0: TopOverlay "A" at 13.75,61.195 h1 r270; TopOverlay "C" at 11.35,61.195 h1 r270
LED-F1: TopOverlay "A" at 36.575,63.995 h1 r90; TopOverlay "C" at 38.975,63.995 h1 r90
LED-F2: TopOverlay "A" at 63.775,61.195 h1 r270; TopOverlay "C" at 61.375,61.195 h1 r270
LED-F3: TopOverlay "A" at 86.74,63.995 h1 r90; TopOverlay "C" at 89.14,63.995 h1 r90
LED-F4: TopOverlay "A" at 113.305,61.195 h1 r270; TopOverlay "C" at 110.905,61.195 h1 r270
LED-F5: TopOverlay "A" at 136.905,63.995 h1 r90; TopOverlay "C" at 139.305,63.995 h1 r90
LED-F6: TopOverlay "A" at 163.47,61.195 h1 r270; TopOverlay "C" at 161.07,61.195 h1 r270
LED-F7: TopOverlay "A" at 186.435,63.995 h1 r90; TopOverlay "C" at 188.835,63.995 h1 r90
LED-G0: TopOverlay "A" at 13.75,36.43 h1 r270; TopOverlay "C" at 11.35,36.43 h1 r270
LED-G1: TopOverlay "A" at 36.575,39.23 h1 r90; TopOverlay "C" at 38.975,39.23 h1 r90
LED-G2: TopOverlay "A" at 63.775,36.43 h1 r270; TopOverlay "C" at 61.375,36.43 h1 r270
LED-G3: TopOverlay "A" at 86.74,39.23 h1 r90; TopOverlay "C" at 89.14,39.23 h1 r90
LED-G4: TopOverlay "A" at 113.365,36.7 h1 r270; TopOverlay "C" at 110.965,36.7 h1 r270
LED-G5: TopOverlay "A" at 136.905,39.23 h1 r90; TopOverlay "C" at 139.305,39.23 h1 r90
LED-G6: TopOverlay "A" at 163.47,36.43 h1 r270; TopOverlay "C" at 161.07,36.43 h1 r270
LED-G7: TopOverlay "A" at 186.435,39.23 h1 r90; TopOverlay "C" at 188.835,39.23 h1 r90